# EAGLE board squid version 13 (EAGLE 6.4)
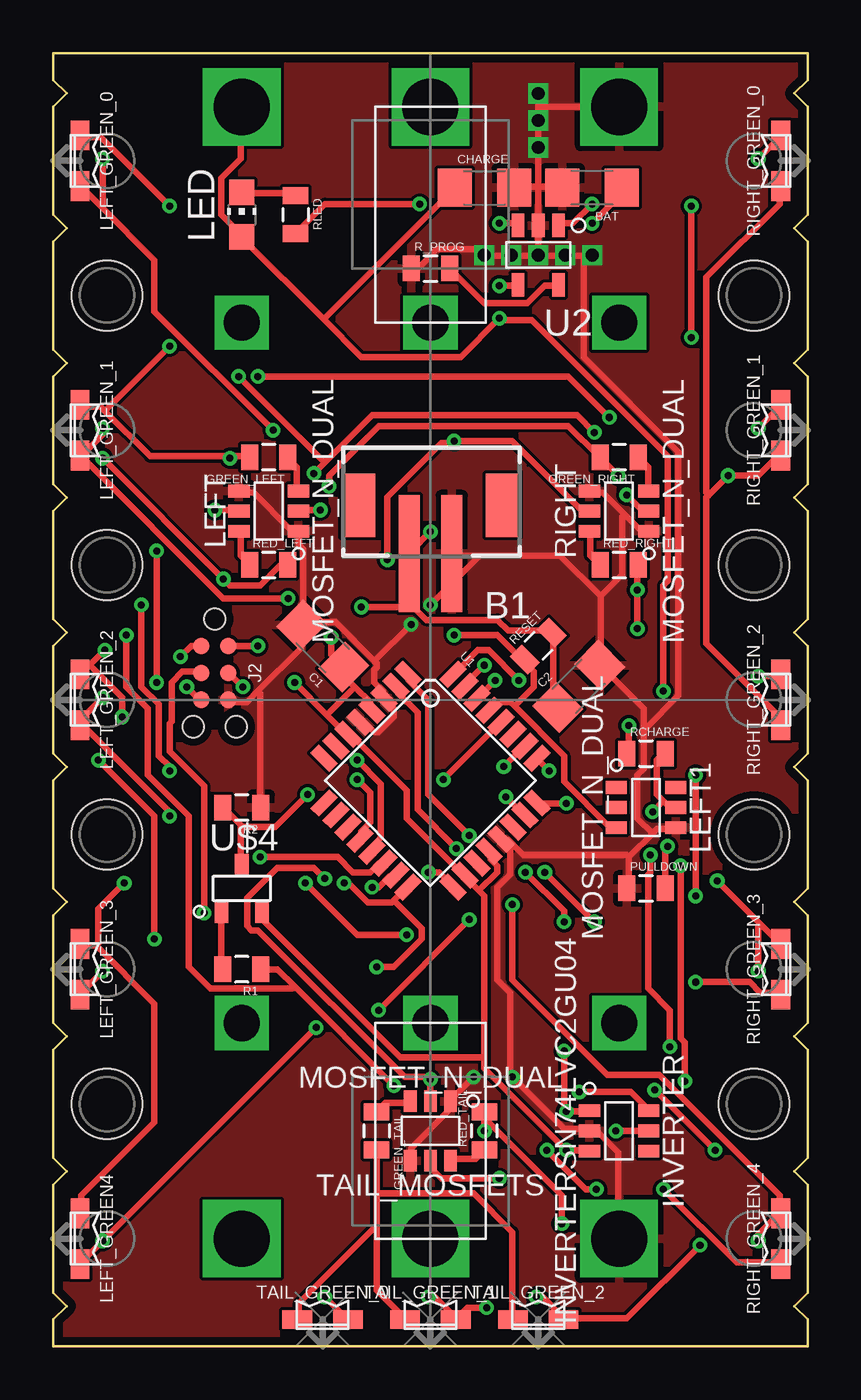
[diagram p0: board, top side]
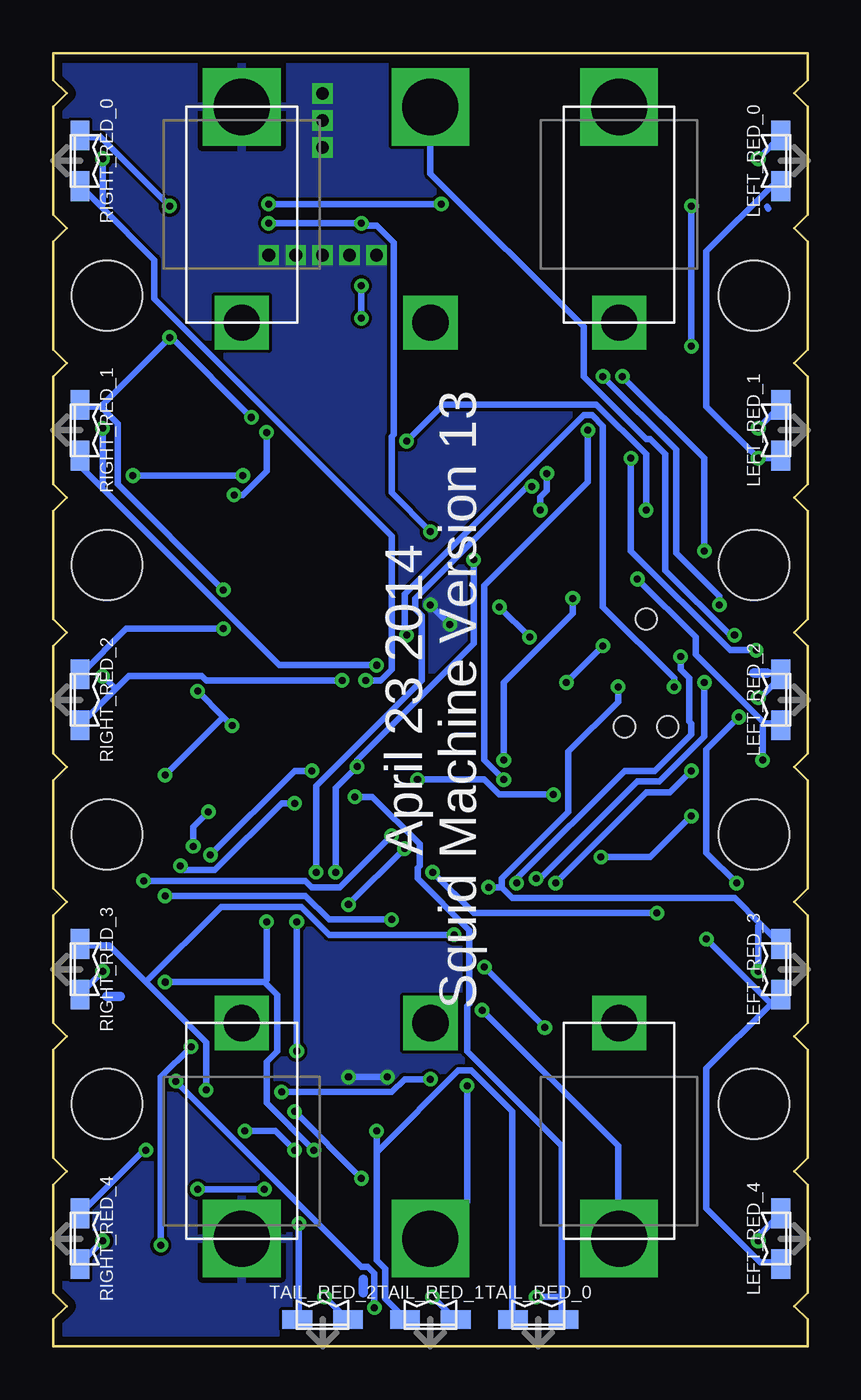
[diagram p1: board, bottom side, seen from below]

Size 35.56 x 60.96 mm. Coordinates in mm from the lower left corner, seen from the top.
Copper layers (1*16): Top 0.0356mm / dielectric 1.5011mm / Bottom 0.0356mm
Design rules "LaenPCBOrder": minimum track width 6mil, minimum drill 13mil, track to track 6mil, track to pad 6mil, pad to pad 6mil, via to via 6mil, smd to smd 6mil, copper to edge 15mil, drill to drill 6mil, minimum pad ring 7mil, minimum via ring 7mil, stop-mask expansion 4mil, vias tented up to drill 0mil, thermal gap 10mil
Net classes: 0 default: width 0.3 mm
Holes 3.3 mm at 2.54,11.43 33.02,11.43 2.54,49.53 33.02,49.53 2.54,36.83 2.54,24.13 33.02,24.13 33.02,36.83

## Footprints (pad centres in the part's own frame; a part is rotated, then mirrored left to right if it is on the bottom)
JST_SM = smd 1 x 5.5: GND 1,-2; VCC -1,-2 | smd 1.6 x 3: P$1 -3.4,0.27; P$2 3.4,0.27
1206 = smd 1.6 x 1.8: 1 -1.4,0; 2 1.4,0
HORIZONTAL_QUICK_CONNECT_3547 = drill 2.642 square: 1 0,5.08 | drill 1.702 square: 2 0,-5.08
0805 = smd 0.8 x 1.2: 1 -0.9,0; 2 0.9,0
SOT-23-6 = smd 0.6 x 1: 1 -0.95,-1.4; 2 0,-1.4; 3 0.95,-1.4; 4 0.95,1.4; 5 0,1.4; 6 -0.95,1.4
TC2030-INC-NL = smd 0.787 x 0.787: 1 1.27,-0.635; 2 1.27,0.635; 3 2.54,-0.635; 4 2.54,0.635; 5 3.81,-0.635; 6 3.81,0.635 | hole 0.991: 0,0; 5.08,1.016; 5.08,-1.016
CHIP-LED0805 = smd 1.2 x 1.2: A 0,-1.05; C 0,1.05
BIVAR_2-PLCC = smd 1.397 x 0.889: A 1.194,0; C -1.194,0
TQFP32-08 = smd 1.27 x 0.559: 1 -4.293,2.8; 2 -4.293,2; 3 -4.293,1.2; 4 -4.293,0.4; 5 -4.293,-0.4; 6 -4.293,-1.2; 7 -4.293,-2; 8 -4.293,-2.8; 17 4.293,-2.8; 18 4.293,-2; 19 4.293,-1.2; 20 4.293,-0.4; 21 4.293,0.4; 22 4.293,1.2; 23 4.293,2; 24 4.293,2.8 | smd 0.559 x 1.27: 9 -2.8,-4.293; 10 -2,-4.293; 11 -1.2,-4.293; 12 -0.4,-4.293; 13 0.4,-4.293; 14 1.2,-4.293; 15 2,-4.293; 16 2.8,-4.293; 25 2.8,4.293; 26 2,4.293; 27 1.2,4.293; 28 0.4,4.293; 29 -0.4,4.293; 30 -1.2,4.293; 31 -2,4.293; 32 -2.8,4.293
SOT-23(OT)5_LEAD = smd 0.6 x 1.1: 1 -0.95,-1.4; 2 0,-1.4; 3 0.95,-1.4; 4 0.95,1.4; 5 -0.95,1.4
SOT-23 = smd 0.65 x 1.05: 1 -0.95,-1.1; 2 0.95,-1.1; 3 0,1.1

## Placement (x,y rotation side)
B1  COIN_CELL_BATTERYJST  [JST_SM]  17.78,39.37 0 top
BAT  4.7u  [1206]  25.4,54.61 180 top
C1  4.7u  [1206]  12.7,33.02 135 top
C2  4.7u  [1206]  24.77,31.11 45 top
CENTER_BOTTOM  FEMALE_QUICK_FIT_TERMINAL  [HORIZONTAL_QUICK_CONNECT_3547]  17.78,53.34 0 top
CENTER_TOP  [HORIZONTAL_QUICK_CONNECT_3547]  17.78,10.16 180 top
CHARGE  4.7u  [1206]  20.32,54.61 0 top
GREEN_LEFT  45  [0805]  10.16,41.91 180 top
GREEN_RIGHT  45  [0805]  26.67,41.91 180 top
GREEN_TAIL  45  [0805]  15.24,10.16 270 top
INVERTER  INVERTERSN74LVC2GU04  [SOT-23-6]  26.67,10.16 270 top
J2  ATMEL_PROGRAMMER_HEADERNL  [TC2030-INC-NL]  7.62,34.29 270 top
LED  RED  [CHIP-LED0805]  8.89,53.34 0 top
LEFT  MOSFET_N_DUAL  [SOT-23-6]  10.16,39.37 90 top
LEFT1  MOSFET_N_DUAL  [SOT-23-6]  27.94,25.4 270 top
LEFT_GREEN4  [BIVAR_2-PLCC]  1.27,5.08 270 top
LEFT_GREEN_0  [BIVAR_2-PLCC]  1.27,55.88 270 top
LEFT_GREEN_1  [BIVAR_2-PLCC]  1.27,43.18 270 top
LEFT_GREEN_2  [BIVAR_2-PLCC]  1.27,30.48 270 top
LEFT_GREEN_3  [BIVAR_2-PLCC]  1.27,17.78 270 top
LEFT_RED_0  [BIVAR_2-PLCC]  1.27,55.88 90 bottom
LEFT_RED_1  [BIVAR_2-PLCC]  1.27,43.18 90 bottom
LEFT_RED_2  [BIVAR_2-PLCC]  1.27,30.48 90 bottom
LEFT_RED_3  [BIVAR_2-PLCC]  1.27,17.78 90 bottom
LEFT_RED_4  [BIVAR_2-PLCC]  1.27,5.08 90 bottom
PULLDOWN  10K  [0805]  27.94,21.59 0 top
R1  1.5M  [0805]  8.89,17.78 180 top
R2  30K  [0805]  8.89,25.4 180 top
R_PROG  25  [0805]  17.78,50.8 0 top
RCHARGE  300  [0805]  27.94,27.94 0 top
RED_LEFT  100  [0805]  10.16,36.83 0 top
RED_RIGHT  100  [0805]  26.67,36.83 0 top
RED_TAIL  100  [0805]  20.32,10.16 90 top
RESET  10K  [0805]  22.86,33.02 45 top
RIGHT  MOSFET_N_DUAL  [SOT-23-6]  26.67,39.37 90 top
RIGHT_GREEN_0  [BIVAR_2-PLCC]  34.29,55.88 90 top
RIGHT_GREEN_1  [BIVAR_2-PLCC]  34.29,43.18 90 top
RIGHT_GREEN_2  [BIVAR_2-PLCC]  34.29,30.48 90 top
RIGHT_GREEN_3  [BIVAR_2-PLCC]  34.29,17.78 90 top
RIGHT_GREEN_4  [BIVAR_2-PLCC]  34.29,5.08 90 top
RIGHT_RED_0  [BIVAR_2-PLCC]  34.29,55.88 270 bottom
RIGHT_RED_1  [BIVAR_2-PLCC]  34.29,43.18 270 bottom
RIGHT_RED_2  [BIVAR_2-PLCC]  34.29,30.48 270 bottom
RIGHT_RED_3  [BIVAR_2-PLCC]  34.29,17.78 270 bottom
RIGHT_RED_4  [BIVAR_2-PLCC]  34.29,5.08 270 bottom
RLED  300  [0805]  11.43,53.34 270 top
TAIL_GREEN_0  [BIVAR_2-PLCC]  12.7,1.27 0 top
TAIL_GREEN_1  [BIVAR_2-PLCC]  17.78,1.27 0 top
TAIL_GREEN_2  [BIVAR_2-PLCC]  22.86,1.27 0 top
TAIL_MOSFETS  MOSFET_N_DUAL  [SOT-23-6]  17.78,10.16 180 top
TAIL_RED_0  [BIVAR_2-PLCC]  12.7,1.27 0 bottom
TAIL_RED_1  [BIVAR_2-PLCC]  17.78,1.27 0 bottom
TAIL_RED_2  [BIVAR_2-PLCC]  22.86,1.27 0 bottom
U1  [TQFP32-08]  17.78,26.67 315 top
U2  MCP73832  [SOT-23(OT)5_LEAD]  22.86,51.44 180 top
U$3  [SQUID2]  2.54,2.54 0 top
U$4  PNP  [SOT-23]  8.89,21.59 0 top
U$8  FEMALE_QUICK_FIT_TERMINAL  [HORIZONTAL_QUICK_CONNECT_3547]  8.89,53.34 0 bottom
U$10  FEMALE_QUICK_FIT_TERMINAL  [HORIZONTAL_QUICK_CONNECT_3547]  26.67,53.34 0 bottom
U$13  FEMALE_QUICK_FIT_TERMINAL  [HORIZONTAL_QUICK_CONNECT_3547]  8.89,10.16 180 bottom
U$17  FEMALE_QUICK_FIT_TERMINAL  [HORIZONTAL_QUICK_CONNECT_3547]  26.67,10.16 180 bottom

## Library data of the parts
B1 CENTER_BOTTOM CENTER_TOP U$8 U$10 U$13 U$17 = Keystone
BAT C1 C2 CHARGE PULLDOWN R1 R2 R_PROG RCHARGE RESET RLED = SparkFun
GREEN_LEFT GREEN_RIGHT GREEN_TAIL RED_LEFT RED_RIGHT RED_TAIL = SparkFun-Passives
INVERTER J2 LEFT LEFT1 LEFT_GREEN4 LEFT_GREEN_0 LEFT_GREEN_1-LEFT_GREEN_3 LEFT_RED_0 LEFT_RED_1-LEFT_RED_4 RIGHT RIGHT_GREEN_0 RIGHT_GREEN_1-RIGHT_GREEN_4 RIGHT_RED_0 RIGHT_RED_1-RIGHT_RED_4 TAIL_GREEN_0 TAIL_GREEN_1 TAIL_GREEN_2 TAIL_MOSFETS TAIL_RED_0 TAIL_RED_1 TAIL_RED_2 U2 U$3 U$4 = ERIC
LED = led
U1 = SparkFun-DigitalIC; PROD_ID: IC-09069; VALUE: ATMEGA328P

## Nets
DIGITAL_5: U1.9
DIGITAL_6: U1.10
DIGITAL_7: U1.11
GND: B1.GND BAT.2 C1.2 C2.2 CHARGE.2 INVERTER.2 J2.6 LEFT1.4 LEFT.1 LEFT.4 PULLDOWN.1 R2.1 R_PROG.1 RIGHT.1 RIGHT.4 TAIL_MOSFETS.1 TAIL_MOSFETS.4 U1.3 U1.5 U1.21 U2.2 U$10.1 U$17.1
GREEN_LEFT_CATHODE: GREEN_LEFT.2 LEFT_GREEN4.C LEFT_GREEN_0.C LEFT_GREEN_1.C LEFT_GREEN_2.C LEFT_GREEN_3.C
N$1: R1.2 U$4.1
N$2: INVERTER.6 LEFT.2 RIGHT.2 TAIL_MOSFETS.2
N$3: LEFT1.5 PULLDOWN.2 RCHARGE.2
N$4: R2.2 U1.28 U$4.3
N$5: GREEN_LEFT.1 LEFT.3
N$6: LEFT.6 RED_LEFT.1
N$7: INVERTER.1 LEFT.5 RIGHT.5 TAIL_MOSFETS.5 U1.26
N$8: GREEN_RIGHT.1 RIGHT.3
N$9: CENTER_BOTTOM.1 CENTER_TOP.1 R1.1
N$10: RED_RIGHT.1 RIGHT.6
N$11: GREEN_RIGHT.2 RIGHT_GREEN_0.C RIGHT_GREEN_1.C RIGHT_GREEN_2.C RIGHT_GREEN_3.C RIGHT_GREEN_4.C
N$12: RED_RIGHT.2 RIGHT_RED_0.C RIGHT_RED_1.C RIGHT_RED_2.C RIGHT_RED_3.C RIGHT_RED_4.C
N$13: GREEN_TAIL.1 TAIL_MOSFETS.3
N$14: LED.C RLED.1
N$15: R_PROG.2 U2.5
N$18: RED_TAIL.1 TAIL_MOSFETS.6
N$19: GREEN_TAIL.2 TAIL_GREEN_0.C TAIL_GREEN_1.C TAIL_GREEN_2.C
N$20: RED_TAIL.2 TAIL_RED_0.C TAIL_RED_1.C TAIL_RED_2.C
PB0: LEFT_GREEN_0.A LEFT_RED_0.A U1.12
PB1: LEFT_GREEN_1.A LEFT_RED_1.A U1.13
PB2: LEFT_GREEN_2.A LEFT_RED_2.A U1.14
PB3: J2.4 LEFT_GREEN_3.A LEFT_RED_3.A U1.15
PB4: J2.1 LEFT_GREEN4.A LEFT_RED_4.A U1.16
PB5: J2.3 U1.17
PC0: TAIL_GREEN_0.A TAIL_RED_0.A U1.23
PC1: TAIL_GREEN_1.A TAIL_RED_1.A U1.24
PC2: TAIL_GREEN_2.A TAIL_RED_2.A U1.25
PD0: RIGHT_GREEN_0.A RIGHT_RED_0.A U1.30
PD1: RIGHT_GREEN_1.A RIGHT_RED_1.A U1.31
PD2: RIGHT_GREEN_2.A RIGHT_RED_2.A U1.32
PD3: RIGHT_GREEN_3.A RIGHT_RED_3.A U1.1
PD4: RIGHT_GREEN_4.A RIGHT_RED_4.A U1.2
RED_LEFT_CATHODE: LEFT_RED_0.C LEFT_RED_1.C LEFT_RED_2.C LEFT_RED_3.C LEFT_RED_4.C RED_LEFT.2
RESET: J2.5 LEFT1.3 RESET.1 U1.29
STAT: RLED.2 U2.1
VBAT: B1.VCC BAT.1 C1.1 C2.1 INVERTER.3 INVERTER.5 J2.2 RESET.2 U1.4 U1.6 U1.18 U1.20 U2.3 U$4.2
VCHARGE: CHARGE.1 LED.A RCHARGE.1 U2.4 U$8.1 U$13.1

## Tracks (layer width: path | path; a pad name or v marks a point on that pad's centre or on a via)
GND  (via drill 0.33, 0.6)
  Top 0.3: v22.86,51.44 22.86,51.41 21.64,51.41 v21.59,51.44 21.54,51.41 20.32,51.41 v20.32,51.44 20.22,51.51 20.02,51.71 18.09,51.71 17.17,50.8 R_PROG.1 | v22.86,51.44 22.96,51.41 24.08,51.41 v24.13,51.44 24.18,51.41 25.4,51.41 v25.4,51.44 24.99,51.31 24.99,46.63 29.46,42.16 29.46,30.68 27.94,29.16 27.84,29.16 | v22.86,59.05 22.86,58.42 | 22.86,58.42 v22.86,57.78 v22.86,56.52 22.86,54.66 | 22.86,54.66 U2.2 v22.86,51.44 | 22.86,54.66 21.74,54.66 CHARGE.2 | 22.86,54.66 23.98,54.66 BAT.2 | U$10.1 22.86,58.42 | TAIL_MOSFETS.4 16.87,8.84 16.87,9.35 18.69,11.18 18.69,11.48 TAIL_MOSFETS.1 18.8,11.68 v19.81,12.7 | 25.3,10.16 INVERTER.2 | INVERTER.2 25.4,10.06 25.7,10.06 26.62,9.14 26.62,5.08 U$17.1 | INVERTER.2 25.2,10.26 24.08,10.26 v21.64,12.7 21.54,12.8 21.54,16.66 20.93,17.27 20.93,21.64 21.54,22.25 21.54,23.57 U1.21 21.13,23.88 21.44,23.88 22.15,23.16 27.03,23.16 27.13,23.06 | LEFT.4 8.84,40.23 9.45,40.23 11.18,38.51 11.48,38.51 LEFT.1 11.58,38.3 11.58,37.8 11.79,37.59 11.79,34.24 C1.2 | U1.5 14.53,29.36 14.73,29.36 15.14,28.96 15.34,28.96 16.05,29.67 16.05,30.07 15.65,30.48 U1.3 15.54,30.68 15.54,30.89 15.14,31.29 15.14,31.9 15.24,32 15.24,32.21 15.14,32.31 | 8.33,30.48 J2.6 8.43,30.38 9.14,30.38 9.65,30.89 | 9.65,30.89 11.68,32.92 11.68,33.93 C1.2 | R2.1 9.75,25.4 9.75,30.79 9.65,30.89 | 15.14,32.31 13.31,34.14 11.79,34.14 C1.2 | 27.13,23.06 28.25,24.18 | 28.25,24.18 28.45,24.38 29.26,24.38 LEFT1.4 | 27.13,23.06 27.13,21.64 PULLDOWN.1 | 26.92,39.22 27.64,38.51 28.04,38.51 RIGHT.1 | 26.92,39.22 25.91,40.23 25.3,40.23 RIGHT.4 | 25.81,35.36 25.81,32.11 C2.2 25.91,32 27.84,30.07 27.84,29.16
  Top 0.3: 25.81,35.36 26.82,36.37 26.82,39.12 26.92,39.22 | 28.25,24.18 27.53,24.89 27.53,26.92 27.84,27.23 27.84,29.16 | 20.02,37.29 23.88,37.29 25.81,35.36 | 20.02,37.29 18.8,37.29 B1.GND | v16.87,34.04 15.14,32.31 | v17.78,34.95 20.02,37.19 20.02,37.29
  Bottom 0.3: v21.64,12.7 v19.81,12.7 | v17.78,34.95 v16.87,34.04
  pour Bottom: -5.08,67.31 43.18,67.31 43.18,-12.7 -5.08,-12.7
  pour Top: -10.16,67.31 48.26,67.31 48.26,-13.97 -10.16,-13.97
GND4
  Bottom 0.45: 32.38,16.51 33.02,16.51
GND9
  Bottom 0.45: 1.91,31.75 2.54,31.75
GND15
  Bottom 0.45: 20.95,3.17 20.95,2.54
GREEN_LEFT_CATHODE  (via drill 0.33)
  Top 0.3: 2.03,18.9 4.78,16.15 4.78,10.57 1.32,7.11 1.32,6.3 LEFT_GREEN4.C | 2.03,18.9 1.32,18.9 LEFT_GREEN_3.C | 8.33,41.96 4.57,41.96 2.44,44.09 | 8.33,41.96 9.25,41.96 GREEN_LEFT.2 | 2.44,44.09 2.23,44.3 1.32,44.3 LEFT_GREEN_1.C | v2.44,32.82 1.73,32.11 | 1.73,32.11 1.32,31.7 LEFT_GREEN_2.C | v8.33,41.86 8.33,41.96 | v5.49,53.75 2.23,57 1.32,57 LEFT_GREEN_0.C | 2.44,44.09 v5.49,47.14 | v3.35,21.84 2.13,20.62 2.13,19 2.03,18.9 | v3.25,29.67 3.25,30.58 1.73,32.11
  Bottom 0.3: v2.44,32.82 3.66,32.82 8.33,37.49 v8.33,41.86 | v5.49,47.14 v5.49,53.75 | v3.35,21.84 4.78,23.27 4.78,28.14 v3.25,29.67
LEFT_RED_CATHODE
  Bottom 0.3: 1.91,53.72 1.86,53.63
N$1
  Top 0.3: U$4.1 7.92,20.42 7.92,17.78 R1.2
N$2  (via drill 0.33)
  Top 0.3: TAIL_MOSFETS.2 v17.78,12.6 17.68,12.7 16.56,12.7 9.65,19.61 9.35,19.61 9.14,19.81 9.14,21.13 10.57,22.55 12.29,22.55 v12.8,22.05 | v24.79,11.99 27.23,11.99 28.04,11.18 INVERTER.6 | v12.6,39.42 11.58,39.42 LEFT.2 | 12.8,41.66 15.04,43.89 24.69,43.89 v25.5,43.08 | 12.8,41.66 v12.29,41.15 | v27.03,40.13 27.74,39.42 28.04,39.42 RIGHT.2 | v4.88,37.49 v4.88,31.29 | 12.8,41.66 v8.74,45.72
  Bottom 0.3: v17.78,12.6 19,12.6 19.61,11.99 v24.79,11.99 | v12.6,39.42 12.6,40.03 12.29,40.34 v12.29,41.15 | v25.5,43.08 25.5,41.25 26.62,40.13 v27.03,40.13 | v12.8,22.05 12.6,22.05 8.03,26.62 7.01,26.62 4.88,28.75 v4.88,31.29 | v4.88,37.49 4.88,41.86 v8.74,45.72
N$3  (via drill 0.33)
  Top 0.3: LEFT1.5 29.06,25.4 28.75,25.7 | 28.75,25.7 28.45,26.01 28.45,27.64 28.75,27.94 RCHARGE.2 | v28.96,23.57 28.85,23.47 28.85,21.64 PULLDOWN.2 | 28.75,25.7 v28.25,25.2
  Bottom 0.3: v28.96,23.57 28.96,24.49 v28.25,25.2
N$4  (via drill 0.33)
  Top 0.3: 8.84,24.49 8.84,24.59 8.03,25.4 R2.2 | 8.84,24.49 8.84,22.76 U$4.3 | v18.39,26.72 21.03,29.36 U1.28 | v11.99,26.01 10.46,24.49 8.84,24.49
  Bottom 0.3: v18.39,26.72 15.24,26.72 14.53,26.01 v11.99,26.01
N$5
  Top 0.3: LEFT.3 11.48,40.34 11.48,41.45 11.07,41.86 GREEN_LEFT.1
N$6
  Top 0.3: LEFT.6 8.84,38.41 8.84,37.29 9.25,36.88 RED_LEFT.1
N$7  (via drill 0.33)
  Top 0.3: TAIL_MOSFETS.5 17.78,8.43 18.29,7.92 v21.03,7.92 | INVERTER.1 25.2,11.07 v24.18,11.07 24.08,11.18 v24.08,13.92 | v7.62,39.42 8.74,39.42 LEFT.5 | RIGHT.5 25.2,39.42 24.89,39.42 21.64,42.67 v18.9,42.67 18.8,42.57 18.29,42.57 15.75,40.03 v15.75,37.08 | v21.23,27.33 22.15,28.25 U1.26 | v24.08,20.02 24.08,20.52 v22.25,22.35
  Bottom 0.3: v24.18,11.07 v21.03,7.92 | v7.62,39.42 7.62,42.06 9.96,44.4 17.17,44.4 v18.9,42.67 | v15.75,37.08 15.75,33.12 21.23,27.64 v21.23,27.33 22.25,26.31 v22.25,22.35 | v24.08,20.02 v24.08,13.92
N$8
  Top 0.3: RIGHT.3 28.04,40.34 28.04,41.45 27.64,41.86 GREEN_RIGHT.1
N$9  (via drill 0.33)
  Top 0.3: R1.1 10.57,17.78 11.38,16.97 | v16.05,12.29 11.38,16.97 | v3.45,33.53 3.45,31.09 4.47,30.07 4.47,26.92 6.4,24.99 6.4,17.88 7.42,16.87 11.28,16.87 11.38,16.97
  Bottom 0.3: v16.05,12.29 16.05,6.81 CENTER_TOP.1 | CENTER_BOTTOM.1 17.78,55.27 10.57,48.06 10.57,45.72 7.62,42.77 7.42,42.77 6.71,42.06 6.71,36.58 3.66,33.53 v3.45,33.53
N$10
  Top 0.3: RIGHT.6 25.3,38.41 25.3,37.29 25.7,36.88 RED_RIGHT.1
N$11  (via drill 0.33)
  Top 0.3: v28.75,7.42 32.21,3.96 34.24,3.96 RIGHT_GREEN_4.C | v25.6,7.42 25.09,7.42 v23.27,9.25 | v30.28,17.17 32.82,17.17 33.33,16.66 34.24,16.66 RIGHT_GREEN_3.C | v26.62,41.05 25.81,41.86 GREEN_RIGHT.2 25.7,41.96 24.28,43.38 15.34,43.38 13.01,41.05 v13.01,40.54 | RIGHT_GREEN_1.C 34.24,42.06 33.22,41.05 v31.8,41.05 30.89,40.13 | 30.89,40.13 30.79,40.03 30.79,33.12 34.24,29.67 34.24,29.36 RIGHT_GREEN_2.C | RIGHT_GREEN_0.C 34.24,54.66 34.24,53.85 30.79,50.39 30.79,40.23 30.89,40.13 | v23.16,22.35 v25.5,20.02
  Bottom 0.3: v25.6,7.42 v28.75,7.42 | v23.27,9.25 25.5,11.48 25.5,13.41 24.99,13.92 24.99,16.56 25.6,17.17 | v30.28,17.17 25.6,17.17 | v31.8,41.05 v26.62,41.05 | v25.5,20.02 25.5,17.27 25.6,17.17 | v23.16,22.35 23.16,26.42 18.19,31.39 18.19,34.44 18.49,34.75 18.49,35.26 13.21,40.54 v13.01,40.54
N$12  (via drill 0.33)
  Top 0.3: v28.35,12.09 v31.19,9.25 | v27.53,33.83 v27.53,35.66 27.53,36.78 RED_RIGHT.2 | v30.07,47.55 v30.07,53.75 | v16.66,19.41 14.33,19.41 v11.89,21.84 | v5.49,27.13 5.49,27.33 4.98,27.84 4.98,30.28 4.17,31.09 v4.17,34.95 | v9.65,45.72 24.28,45.72 v26.21,43.79
  Bottom 0.3: v31.19,9.25 31.29,9.25 34.24,6.3 RIGHT_RED_4.C | v28.35,12.09 28.35,14.33 31.19,17.17 | 31.19,17.17 32.92,18.9 34.24,18.9 RIGHT_RED_3.C | v27.53,33.83 32.11,33.83 34.24,31.7 RIGHT_RED_2.C | 33.33,44.3 34.24,44.3 RIGHT_RED_1.C | 33.33,44.3 32.51,43.48 32.51,40.64 v27.53,35.66 | v30.07,53.75 33.33,57 34.24,57 RIGHT_RED_0.C | 33.33,44.3 v30.07,47.55 29.97,47.55 v26.21,43.79 | 31.19,17.17 27.64,20.73 23.88,20.73 22.55,19.41 v16.66,19.41 | v11.89,21.84 7.62,26.11 6.5,26.11 v5.49,27.13 | v4.17,34.95 4.17,35.36 6.2,37.39 6.2,42.27 v9.65,45.72
N$13
  Top 0.3: TAIL_MOSFETS.3 16.76,11.48 15.65,11.48 15.24,11.07 GREEN_TAIL.1
N$14
  Top 0.3: LED.C 8.94,54.36 11.28,54.36 11.38,54.25 RLED.1
N$15
  Top 0.3: U2.5 23.77,49.99 23.16,49.99 22.35,49.17 20.32,49.17 18.69,50.8 R_PROG.2
N$18
  Top 0.3: TAIL_MOSFETS.6 18.8,8.84 19.91,8.84 20.32,9.25 RED_TAIL.1
N$19
  Top 0.3: 15.24,5.59 15.24,2.64 16.56,1.32 TAIL_GREEN_1.C | 15.24,5.59 15.24,7.21 | 15.24,7.21 GREEN_TAIL.2 | TAIL_GREEN_0.C 11.58,1.32 11.58,2.03 15.14,5.59 15.24,5.59 | 15.24,7.21 19.81,7.21 21.64,5.38 21.64,1.32 TAIL_GREEN_2.C
N$20  (via drill 0.33)
  Top 0.3: v20.32,10.16 RED_TAIL.2 20.42,10.67 23.98,7.11 v23.98,5.79
  Bottom 0.3: 20.32,9.25 20.32,4.06 19.91,3.66 19.91,2.23 19,1.32 TAIL_RED_1.C | 20.32,9.25 v20.32,10.16 | TAIL_RED_0.C 13.92,1.32 13.92,11.07 15.85,13.01 16.46,13.01 20.22,9.25 20.32,9.25 | v23.98,5.79 23.98,1.32 TAIL_RED_2.C
PB0  (via drill 0.33)
  Top 0.3: v14.33,26.72 14.94,26.11 14.94,24.69 14.53,24.28 14.53,23.98 U1.12 | v10.36,43.18 4.78,48.77 4.78,51.21 2.23,53.75 | 2.23,53.75 1.32,54.66 LEFT_GREEN_0.A | v2.34,55.98 2.34,53.85 2.23,53.75
  Bottom 0.3: v14.33,26.72 15.24,27.64 15.24,35.87 10.36,40.74 v10.36,43.18 | v2.34,55.98 1.32,57 LEFT_RED_0.A
PB1  (via drill 0.33)
  Top 0.3: v14.33,27.64 15.44,26.52 15.44,23.98 15.04,23.57 15.04,23.37 U1.13 | v11.07,35.26 8.03,35.26 1.32,41.96 LEFT_GREEN_1.A 1.42,42.06 2.34,42.98 v2.34,43.28
  Bottom 0.3: v14.33,27.64 14.33,31.29 11.07,34.54 v11.07,35.26 | v2.34,43.28 1.32,44.3 LEFT_RED_1.A
PB2  (via drill 0.33)
  Top 0.3: v9.75,23.06 13.41,23.06 14.12,22.35 14.94,22.35 15.34,22.76 15.54,22.76 U1.14 | v5.49,24.99 5.49,25.2 1.32,29.36 LEFT_GREEN_2.A 1.22,29.46 v2.34,30.58
  Bottom 0.3: v9.75,23.06 7.42,23.06 v5.49,24.99 | v2.34,30.58 2.23,30.58 1.32,31.5 1.32,31.6 LEFT_RED_2.A
PB3  (via drill 0.33)
  Top 0.3: v8.94,31.09 8.33,31.7 J2.4 | v15.04,21.64 15.34,21.64 15.85,22.15 16.15,22.15 U1.15 | v2.34,17.68 1.32,16.66 LEFT_GREEN_3.A
  Bottom 0.3: v8.94,31.09 8.94,30.38 11.28,28.04 11.28,25.2 14.43,22.05 14.43,21.64 | 14.43,21.64 13.92,21.13 3.45,21.13 2.23,19.91 | 2.23,19.91 1.32,19 LEFT_RED_3.A | 14.43,21.64 v15.04,21.64 | v2.34,17.68 2.34,19.81 2.23,19.91
PB4  (via drill 0.33)
  Top 0.3: LEFT_GREEN4.A 1.32,3.96 v2.34,4.98 v12.39,15.04 | J2.1 6.5,33.02 v5.99,32.51 | v13.72,21.84 13.92,21.84 14.83,20.93 15.95,20.93 16.05,21.03 | 16.05,21.03 16.66,21.64 U1.16 | v15.24,17.88 16.05,17.88 17.37,19.2 17.37,19.71 16.05,21.03
  Bottom 0.3: v2.34,4.98 2.34,5.18 1.32,6.2 LEFT_RED_4.A | v5.99,32.51 5.99,31.9 5.59,31.5 5.59,29.46 5.49,29.36 5.49,28.85 7.21,27.13 8.64,27.13 13.72,22.05 v13.72,21.84 | v15.24,17.88 v12.39,15.04
PB5  (via drill 0.33)
  Top 0.3: v7.11,20.42 7.11,26.42 5.49,28.04 5.49,29.36 5.59,29.46 5.59,31.29 6.1,31.8 6.91,31.8 J2.3 | v17.68,22.35 18.19,22.35 18.8,21.74 U1.17
  Bottom 0.3: v7.11,20.42 15.75,20.42 v17.68,22.35
PC0  (via drill 0.33)
  Top 0.3: v21.34,25.91 22.15,25.09 U1.23 | v12.8,2.34 13.82,1.32 TAIL_GREEN_0.A
  Bottom 0.3: v21.34,25.91 20.52,25.91 18.29,23.67 18.29,22.66 18.39,22.55 18.39,22.05 15.95,19.61 15.95,16.15 16.05,16.05 16.05,13.92 11.58,9.45 11.58,2.34 | 11.58,2.34 11.58,1.32 TAIL_RED_0.A | 11.58,2.34 v12.8,2.34
PC1  (via drill 0.33)
  Top 0.3: v24.18,25.6 22.86,25.6 U1.24 | v29.57,22.66 29.57,14.53 29.77,14.33 v29.77,12.5 | v20.42,1.83 19.51,1.83 19,1.32 TAIL_GREEN_1.A 18.9,1.42 17.98,2.34 v17.68,2.34
  Bottom 0.3: v24.18,25.6 24.79,25.6 27.94,22.45 29.36,22.45 v29.57,22.66 | v29.77,12.5 21.03,3.76 20.73,3.76 20.42,3.45 v20.42,1.83 | v17.68,2.34 16.66,1.32 TAIL_RED_1.A
PC2  (via drill 0.33)
  Top 0.3: v23.37,27.13 22.86,27.64 U1.25 | v28.14,23.16 28.14,22.35 28.04,22.25 28.04,16.87 29.06,15.85 v29.06,14.12 | v30.48,4.78 27.03,1.32 24.08,1.32 TAIL_GREEN_2.A 23.98,1.42 23.06,2.34 v22.76,2.34
  Bottom 0.3: v23.37,27.13 24.18,27.13 v28.14,23.16 | v29.06,14.12 30.48,12.7 v30.48,4.78 | v22.76,2.34 21.74,1.32 TAIL_RED_2.A
PD0  (via drill 0.33)
  Top 0.3: v20.83,31.39 20.02,30.58 U1.30 | v33.22,55.98 34.24,57 RIGHT_GREEN_0.A
  Bottom 0.3: v20.83,31.39 20.12,31.39 19.61,31.9 19.61,38.2 30.79,49.38 30.79,51.21 33.33,53.75 | 33.33,53.75 34.24,54.66 RIGHT_RED_0.A | v33.22,55.98 33.22,53.85 33.33,53.75
PD1  (via drill 0.33)
  Top 0.3: v20.32,32.11 19.41,31.19 U1.31 | v33.22,43.28 34.24,44.3 RIGHT_GREEN_1.A
  Bottom 0.3: v20.32,32.11 24.89,32.11 33.33,40.54 | 33.33,40.54 34.24,41.45 34.24,41.96 RIGHT_RED_1.A | v33.22,43.28 33.22,40.64 33.33,40.54
PD2  (via drill 0.33)
  Top 0.3: v21.95,31.39 20.52,32.82 20.02,32.82 18.9,31.7 U1.32 | v33.22,31.6 34.24,31.6 RIGHT_GREEN_2.A
  Bottom 0.3: v21.95,31.39 28.35,31.39 28.55,31.6 32,31.6 32.61,30.99 | 32.61,30.99 34.24,29.36 RIGHT_RED_2.A | 32.61,30.99 v33.22,31.6
PD3  (via drill 0.33)
  Top 0.3: v19.61,24.08 17.68,26.01 17.68,30.48 16.76,31.39 16.76,31.6 U1.1 | 33.33,19.91 34.24,19 RIGHT_GREEN_3.A | 33.33,19.91 v31.29,21.95 | v33.22,17.68 33.22,19.81 33.33,19.91
  Bottom 0.3: v19.61,24.08 22.05,21.64 23.37,21.64 23.67,21.95 v31.29,21.95 | v33.22,17.68 34.24,16.66 RIGHT_RED_3.A
PD4  (via drill 0.33)
  Top 0.3: v19,23.47 17.17,25.3 17.17,29.87 16.26,30.79 16.26,31.09 U1.2 | v21.64,20.83 21.64,17.27 26.11,12.8 28.55,12.8 34.24,7.11 34.24,6.3 RIGHT_GREEN_4.A 34.14,6.2 33.22,5.28 v33.22,4.98
  Bottom 0.3: v21.64,20.83 v19,23.47 | v33.22,4.98 34.24,3.96 RIGHT_RED_4.A
RED_LEFT_CATHODE  (via drill 0.33)
  Top 0.3: v2.34,41.86 v8.03,36.17 8.33,35.87 9.75,35.87 10.67,36.78 10.97,36.78 RED_LEFT.2 | v4.78,19.2 4.78,24.99 v2.13,27.64
  Bottom 0.3: 1.73,16.15 1.32,16.56 LEFT_RED_3.C | 1.73,16.15 4.78,13.11 4.78,6.5 2.23,3.96 1.32,3.96 LEFT_RED_4.C | LEFT_RED_1.C 1.32,41.96 1.42,41.86 v2.34,41.86 4.78,44.3 4.78,51.61 1.73,54.66 1.32,54.66 LEFT_RED_0.C | 2.03,29.36 1.32,29.36 LEFT_RED_2.C | 2.03,29.36 5.28,32.61 5.28,33.43 v8.03,36.17 | v4.78,19.2 1.73,16.15 | v2.13,27.64 2.13,29.26 2.03,29.36
RESET  (via drill 0.33)
  Top 0.3: 21.74,30.18 21.54,30.38 20.93,30.38 20.62,30.07 U1.29 | 21.74,30.18 24.08,27.84 24.08,26.62 26.21,24.49 26.52,24.49 LEFT1.3 | v6.3,31.09 6.91,30.48 J2.5 | v18.9,33.53 20.93,33.53 22.15,32.31 RESET.1 22.25,32.21 22.66,31.8 22.66,31.09 21.74,30.18
  Bottom 0.3: v6.3,31.09 6.3,31.5 9.65,34.85 9.65,43.38 10.16,43.89 10.57,43.89 19,35.46 19,33.63 v18.9,33.53
STAT  (via drill 0.33)
  Top 0.3: v25.4,53.85 24.49,52.93 23.88,52.93 U2.1 | v17.27,53.85 12.8,53.85 11.48,52.53 RLED.2
  Bottom 0.3: v17.27,53.85 v25.4,53.85
VBAT  (via drill 0.33)
  Top 0.3: v21.03,52.93 21.84,52.93 U2.3 | v25.4,52.93 26.72,54.25 26.72,54.56 BAT.1 | C2.1 23.77,30.18 23.57,30.38 23.57,33.63 RESET.2 23.37,33.73 21.44,33.73 20.93,34.24 17.58,34.24 16.87,34.95 16.87,37.29 B1.VCC | v17.78,38.41 16.87,37.49 B1.VCC | 14.22,31.09 13.72,31.6 13.72,32 C1.1 13.61,32.11 13.11,32.61 v13.11,33.43 | 14.22,31.09 14.94,30.38 14.94,30.07 U1.4 | v9.65,33.02 J2.2 | 12.9,29.77 13.82,28.85 U1.6 14.02,28.85 16.66,26.21 16.66,24.89 19.3,22.25 U1.18 19.41,22.15 20.07,21.49 | 12.9,29.77 v11.38,31.29 | 12.9,29.77 14.22,31.09 | 20.32,13.61 20.32,21.23 20.07,21.49 | 20.32,13.61 20.32,13.11 v24.18,9.25 25.2,9.25 INVERTER.3 | v26.52,10.16 INVERTER.5 | 20.32,13.61 16.36,13.61 9.86,20.12 9.86,20.42 U$4.2 | 20.07,21.49 20.93,22.35 20.93,22.66 20.62,22.96 20.62,23.27 U1.20 | v14.53,34.85 16.76,34.85 B1.VCC
  Bottom 0.3: v25.4,52.93 v21.03,52.93 20.93,52.83 20.32,52.83 19.51,52.02 19.51,42.98 19.61,42.88 19.61,40.23 v17.78,38.41 | v11.38,31.29 v9.65,33.02 | v26.52,10.16 25.09,10.16 v24.18,9.25 | v13.11,33.43 v14.53,34.85
VCHARGE  (via drill 0.33)
  Top 0.3: v21.03,49.99 21.84,49.99 U2.4 | 12.75,48.41 8.94,52.22 LED.A 8.84,52.43 7.92,53.34 7.92,55.07 8.84,55.98 8.84,58.42 U$8.1 | 12.75,48.41 14.53,46.63 19.2,46.63 v21.03,48.46 21.13,48.36 22.55,48.36 28.96,41.96 28.96,36.07 28.75,35.87 v28.75,30.89 | v27.13,29.26 27.13,27.94 RCHARGE.1 | 12.75,48.41 18.9,54.56 CHARGE.1 | v19.61,20.12 v15.34,15.85 | v30.28,26.92 v30.28,21.23
  Bottom 0.3: v21.03,48.46 v21.03,49.99 | v28.75,30.89 27.53,29.67 | 27.53,29.67 v27.13,29.26 | v15.34,15.85 8.94,9.45 8.94,5.08 U$13.1 | v19.61,20.12 22.55,20.12 23.67,21.23 v30.28,21.23 | 27.53,29.67 v30.28,26.92

## Text on the board
bPlace: Squid Machine Version 13 | April 23 2014